# EAGLE board All_Board (EAGLE 9.5.1)
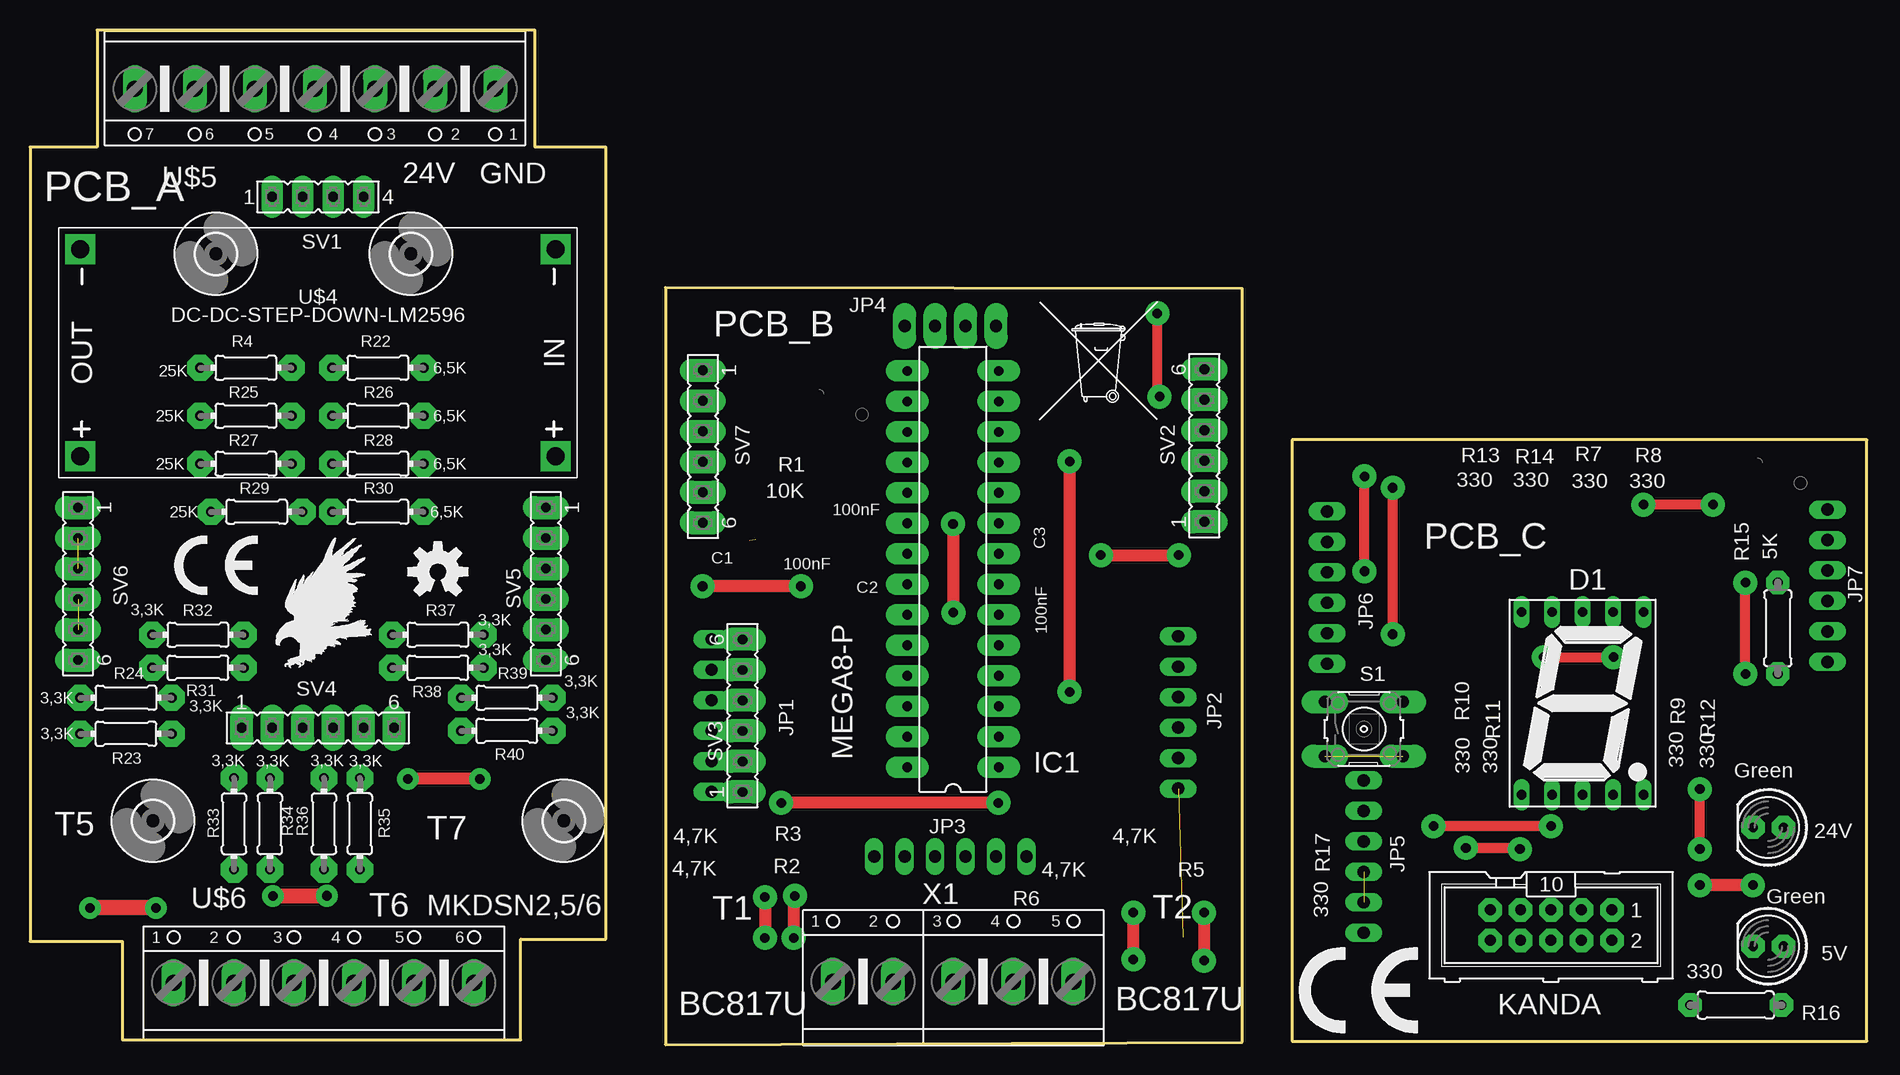
[diagram p0: board, top side]
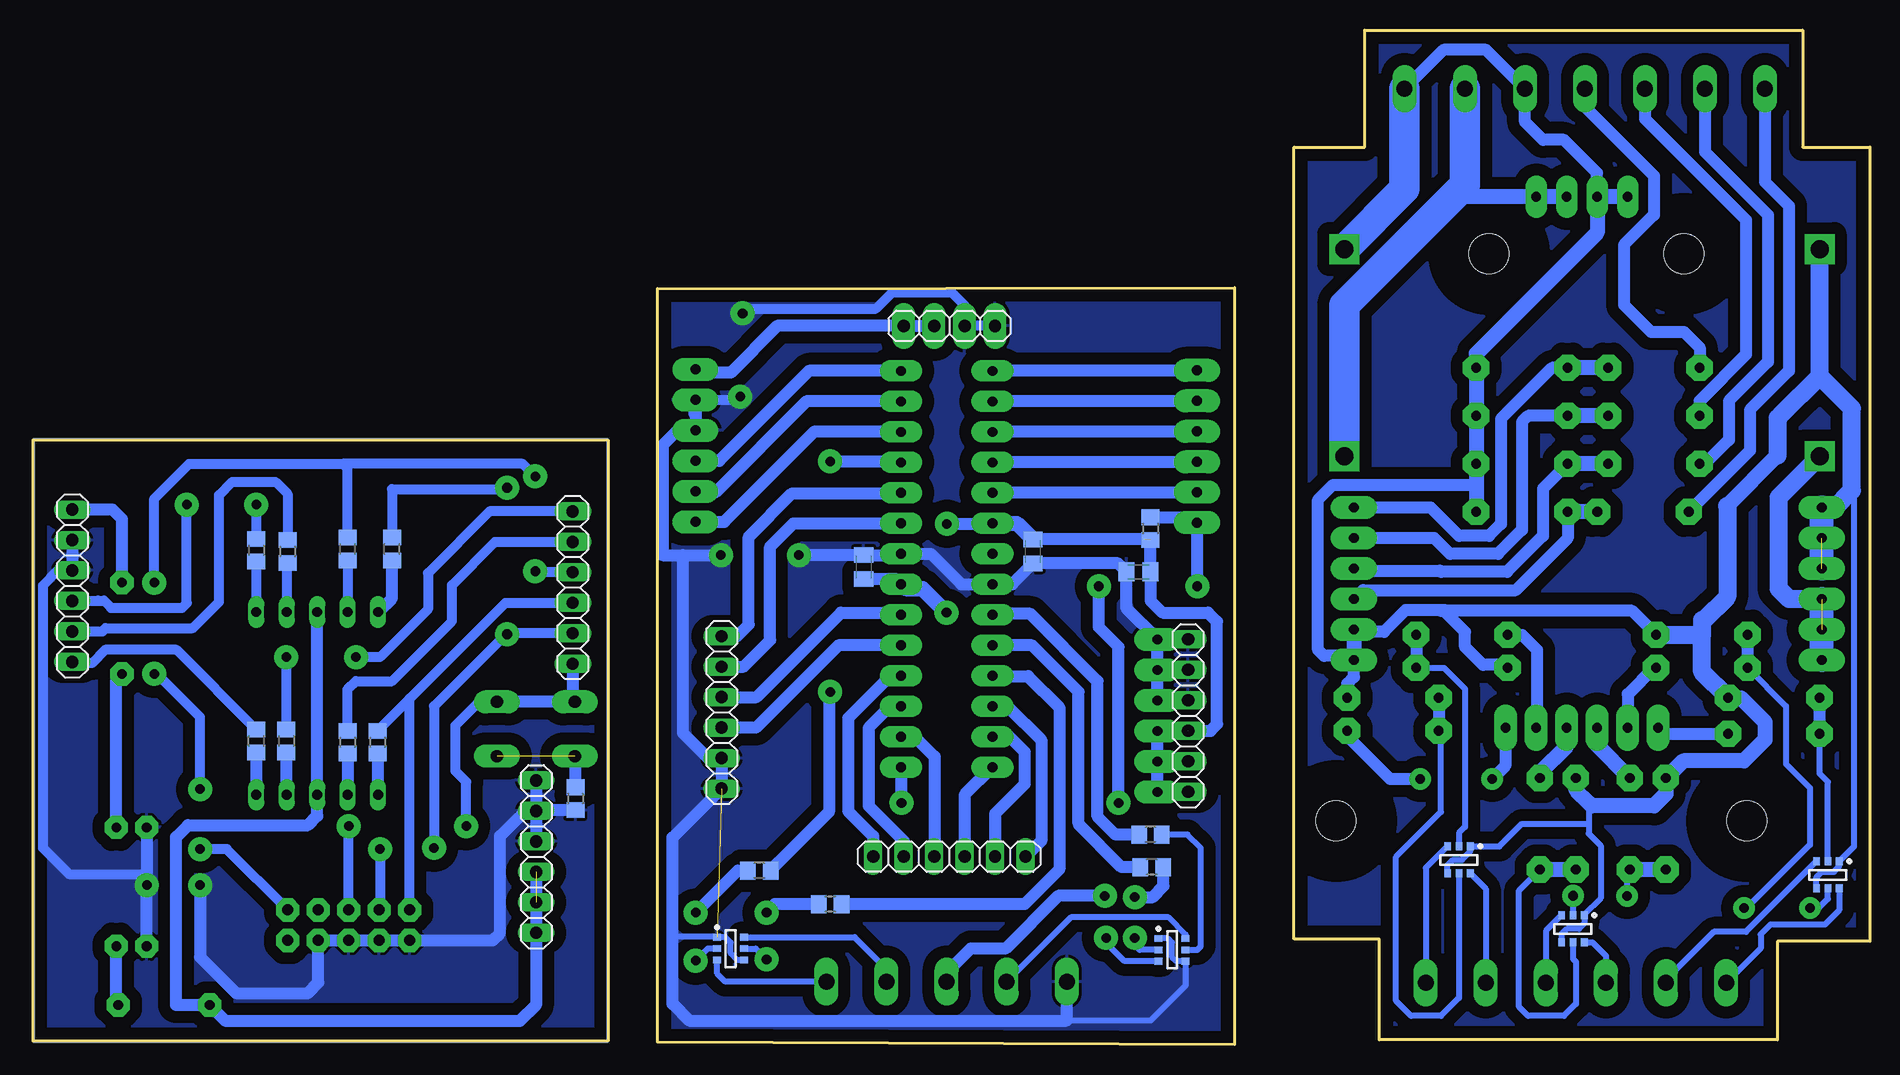
[diagram p1: board, bottom side, seen from below]

Size 153.11 x 84.55 mm. Coordinates in mm from the lower left corner, seen from the top.
Outline: 5.6,84.55 5.6,74.8 0,74.8 0,8.6 7.7,8.6 7.7,0.4 40.9,0.4 40.9,8.8 48,8.8 48,74.8 42.1,74.8 42.1,84.55 5.6,84.55
Outline: 101.06,63 52.96,63.07 52.96,0 101.06,0.2 101.06,63
Outline: 105.19,50.4 105.19,0.3 153.11,0.3 153.11,50.4 105.19,50.4
Copper layers (1*16): Top 0.035mm / dielectric 1.5mm / Bottom 0.035mm
Design rules "default": minimum track width 6mil, minimum drill 0.35mm, track to track 6mil, track to pad 6mil, pad to pad 6mil, via to via 6mil, smd to smd 6mil, copper to edge 40mil, drill to drill 6mil, minimum pad ring 10mil, minimum via ring 8mil, stop-mask expansion 4mil, vias tented up to drill 0mil, thermal gap 10mil

## Footprints (pad centres in the part's own frame; a part is rotated, then mirrored left to right if it is on the bottom)
LED5MM = drill 0.813 pad 1.93 octagon: A -1.27,0; K 1.27,0
C0805K = smd 1.3 x 1.6: 1 -1,0; 2 1,0
7SEG-13 = drill 0.813 long: 1 -5.08,-7.62; 2 -2.54,-7.62; 3 0,-7.62; 4 2.54,-7.62; 5 5.08,-7.62; 6 5.08,7.62; 7 2.54,7.62; 8 0,7.62; 9 -2.54,7.62; 10 -5.08,7.62
3,3 = hole 3.3: 0,0
DIL28-3 = drill 0.813 pad 1.778 long: 1 -16.51,-3.81; 2 -13.97,-3.81; 3 -11.43,-3.81; 4 -8.89,-3.81; 5 -6.35,-3.81; 6 -3.81,-3.81; 7 -1.27,-3.81; 8 1.27,-3.81; 9 3.81,-3.81; 10 6.35,-3.81; 11 8.89,-3.81; 12 11.43,-3.81; 13 13.97,-3.81; 14 16.51,-3.81; 15 16.51,3.81; 16 13.97,3.81; 17 11.43,3.81; 18 8.89,3.81; 19 6.35,3.81; 20 3.81,3.81; 21 1.27,3.81; 22 -1.27,3.81; 23 -3.81,3.81; 24 -6.35,3.81; 25 -8.89,3.81; 26 -11.43,3.81; 27 -13.97,3.81; 28 -16.51,3.81
1X06H = drill 1.016 long: 1 -6.35,0; 2 -3.81,0; 3 -1.27,0; 4 1.27,0; 5 3.81,0; 6 6.35,0
1X04H = drill 1.016 pad 1.93 long: 1 -3.81,0; 2 -1.27,0; 3 1.27,0; 4 3.81,0
ML10 = drill 0.914 pad 1.93 octagon: 1 -5.08,-1.27; 2 -5.08,1.27; 3 -2.54,-1.27; 4 -2.54,1.27; 5 0,-1.27; 6 0,1.27; 7 2.54,-1.27; 8 2.54,1.27; 9 5.08,-1.27; 10 5.08,1.27
R0805 = smd 1.3 x 1.5: 1 -0.95,0; 2 0.95,0
0204/7 = drill 0.813 pad 2.184 octagon: 1 -3.81,0; 2 3.81,0
0207/7 = drill 0.813 pad 1.93 octagon: 1 -3.81,0; 2 3.81,0
B3F-10XX = drill 1.016 pad 1.93 long: 1 -3.251,2.261; 2 3.251,2.261; 3 -3.251,-2.261; 4 3.251,-2.261
FE04-1 = drill 0.813 pad 1.778 long: 1 -3.81,0; 2 -1.27,0; 3 1.27,0; 4 3.81,0
FE06 = drill 0.813 pad 1.93 long: 1 -6.35,0; 2 -3.81,0; 3 -1.27,0; 4 1.27,0; 5 3.81,0; 6 6.35,0
INF-SC74 = smd 0.65 x 0.55: 1 -1.125,0.95; 2 -1.125,0; 3 -1.125,-0.95; 4 1.125,-0.95; 5 1.125,0; 6 1.125,0.95
DC-DC-STEP-DOWN-LM2596 = drill 1.5 pad 2.5 square: IN+ -19.812,8.636; IN- -19.812,-8.636; OUT+ 19.812,8.636; OUT- 19.812,-8.636
MKDSN2,5/7 = drill 1.321 long: 1 -15.033,0; 2 -10.004,0; 3 -5,0; 4 0.004,0; 5 5.008,0; 6 10.008,0; 7 15.008,0
MKDSN2,5/6 = drill 1.321 long: 1 -12.533,0; 2 -7.504,0; 3 -2.5,0; 4 2.504,0; 5 7.508,0; 6 12.508,0
MKDS_3/5 = drill 1.321 long: 1 -10.033,0; 2 -5.004,0; 3 0,0; 4 5.004,0; 5 10.008,0

## Placement (x,y rotation side)
5V  Green  [LED5MM]  144.89,8.2 180 top
24V  Green  [LED5MM]  144.89,18.1 180 top
C1  100nF  [C0805K]  60.96,39.4 180 bottom
C2  100nF  [C0805K]  69.76,41.1 270 bottom
C3  100nF  [C0805K]  83.86,39.8 90 bottom
D1  [7SEG-13]  129.42,28.44 0 top
H1  MOUNT-HOLE3.3  [3,3]  10.25,18.65 0 top
H2  MOUNT-HOLE3.3  [3,3]  15.5,65.9 0 top
H3  MOUNT-HOLE3.3  [3,3]  44.5,18.65 0 top
H4  MOUNT-HOLE3.3  [3,3]  31.75,65.9 0 top
IC1  MEGA8-P  [DIL28-3]  76.94,39.63 90 top
JP1  [1X06H]  56.82,27.42 90 bottom
JP2  [1X06H]  95.71,27.69 90 bottom
JP3  [1X06H]  76.72,15.67 180 bottom
JP4  [1X04H]  76.72,59.89 0 bottom
JP5  [1X06H]  111.17,15.66 90 bottom
JP6  [1X06H]  108.12,38.08 270 bottom
JP7  [1X06H]  149.83,38.24 90 bottom
KANDA  [ML10]  126.79,9.95 180 top
R1  10K  [R0805]  59.96,43 270 bottom
R2  4,7K  [R0805]  59.86,14.8 180 bottom
R3  4,7K  [R0805]  59.96,17.5 180 bottom
R4  25K  [0204/7]  18,56.4 180 top
R5  4,7K  [R0805]  92.56,14.5 180 bottom
R6  4,7K  [R0805]  86.66,11.7 180 bottom
R7  330  [R0805]  131.89,41.1 270 bottom
R8  330  [R0805]  134.49,41.2 270 bottom
R9  330  [R0805]  131.99,25.3 270 bottom
R10  330  [R0805]  126.89,25.2 270 bottom
R11  330  [R0805]  124.39,25.2 270 bottom
R12  330  [R0805]  134.49,25.3 90 bottom
R13  330  [R0805]  123.19,41.3 90 bottom
R14  330  [R0805]  126.89,41.3 90 bottom
R15  5K  [0207/7]  145.69,34.7 90 top
R16  330  [0207/7]  142.19,3.3 180 top
R17  330  [R0805]  107.89,20.5 270 bottom
R22  6,5K  [0204/7]  29,56.4 180 top
R23  3,3K  [0204/7]  8,28.9 180 top
R24  3,3K  [0204/7]  8,25.9 0 top
R25  25K  [0204/7]  18,52.4 180 top
R26  6,5K  [0204/7]  29,52.4 180 top
R27  25K  [0204/7]  18,48.4 180 top
R28  6,5K  [0204/7]  29,48.4 180 top
R29  25K  [0204/7]  18.9,44.4 180 top
R30  6,5K  [0204/7]  29,44.4 180 top
R31  3,3K  [0204/7]  14,34.15 180 top
R32  3,3K  [0204/7]  14,31.4 0 top
R33  3,3K  [0204/7]  17,18.4 270 top
R34  3,3K  [0204/7]  20,18.4 90 top
R35  3,3K  [0204/7]  24.5,18.4 270 top
R36  3,3K  [0204/7]  27.5,18.4 90 top
R37  3,3K  [0204/7]  34,31.4 0 top
R38  3,3K  [0204/7]  34,34.15 180 top
R39  3,3K  [0204/7]  39.75,28.9 180 top
R40  3,3K  [0204/7]  39.75,26.15 0 top
S1  [B3F-10XX]  111.19,26.3 0 top
SV1  [FE04-1]  24,70.65 0 top
SV2  [FE06]  97.89,49.92 90 top
SV3  [FE06]  59.39,27.41 90 top
SV4  [FE06]  24,26.4 0 top
SV5  [FE06]  43,38.4 270 top
SV6  [FE06]  4,38.4 270 top
SV7  [FE06]  56.09,49.84 270 top
T1  BC817U  [INF-SC74]  58.16,7.9 0 bottom
T2  BC817U  [INF-SC74]  94.96,8 0 bottom
T5  BC817U  [INF-SC74]  3.5,14.15 270 bottom
T6  BC817U  [INF-SC74]  24.75,9.65 270 bottom
T7  BC817U  [INF-SC74]  34.25,15.4 270 bottom
U$1  [CE_5MM]  12,37.4 0 top
U$2  [EAGLE-PLC-8MM]  20.5,31.4 0 top
U$3  [OSHW-LOGO-M]  34,39.4 0 top
U$4  DC-DC-STEP-DOWN-LM2596  [DC-DC-STEP-DOWN-LM2596]  24,57.65 180 top
U$5  24V  [MKDSN2,5/7]  23.75,79.65 180 top
U$6  MKDSN2,5/6  [MKDSN2,5/6]  24.5,5.15 0 top
U$7  [LOGO]  61.96,52 0 top
U$8  [TONNE_10.00]  88.96,55 0 top
U$9  [CE_7.3MM]  105.69,0.9 0 top
U$10  [LOGO]  140.19,46.3 0 top
X1  [MKDS_3/5]  76.96,5.25 0 top

## Library data of the parts
5V 24V = led
C1-C3 = rcl; SPICEPREFIX: C
D1 = special
H1-H4 = holes
IC1 = atmel; OC_FARNELL: unknown; OC_NEWARK: unknown
JP1-JP7 = pinhead
KANDA = con-harting-ml; OC_FARNELL: unknown; OC_NEWARK: unknown
R1-R17 R22-R40 = rcl; SPICEPREFIX: R
S1 = switch-omron; MPN: B3F-1000; OC_FARNELL: 176432; OC_NEWARK: 36M3542
SV1-SV7 = con-lsta; OC_FARNELL: unknown; OC_NEWARK: unknown
T1 T2 T5-T7 = transistor
U$1 U$2 U$8 U$9 = logo
U$3 = Particle-Devices
U$4 = diy-modules
U$5 U$6 = con-ptr500
U$7 U$10 = atmel
X1 = con-ptr500; OC_FARNELL: unknown; OC_NEWARK: unknown

## Nets
+5V: SV6.4 SV6.5 SV6.6 U$4.OUT+
+5V1: C1.1 C2.1 C3.1 IC1.7 IC1.20 JP1.1 JP1.2 JP1.3 R1.2 SV3.1 SV3.2 SV3.3
+5V2: D1.3 D1.8 JP5.1 JP5.2 JP5.3 R16.2
+24V: SV1.3 SV1.4 U$4.IN+ U$5.2
+24V1: JP4.1 JP4.2 SV2.6
+24V2: JP7.6 R15.2
A: IC1.13 SV2.2
A1: JP7.2 R7.1
B: IC1.14 SV2.3
B1: JP7.3 R8.1
C: IC1.15 SV7.1
C1: JP6.1 R9.1
D: IC1.16 SV7.2
D1: JP6.2 R10.1
DOT: IC1.12 SV2.1
DOT1: JP7.1 R12.2
GND: R22.1 R23.1 R26.1 R28.1 R30.1 R31.1 R33.1 R35.1 R37.1 R39.1 SV1.1 SV1.2 SV5.5 SV5.6 SV6.1 SV6.2 SV6.3 T5.1 T5.4 T6.1 T6.4 T7.1 T7.4 U$4.IN- U$4.OUT- U$5.1 U$5.3
GND1: C1.2 C2.2 C3.2 IC1.8 IC1.22 JP1.4 JP1.5 JP1.6 JP2.1 JP2.2 JP4.3 JP4.4 SV2.4 SV2.5 SV3.4 SV3.5 SV3.6 T1.1 T1.4 T2.1 T2.4 X1.1
GND2: 5V.K 24V.K JP5.4 JP5.5 JP5.6 JP7.4 JP7.5 KANDA.4 KANDA.6 KANDA.8 KANDA.10 R17.2
IN_1: R4.1 R22.2 SV5.1
IN_2: R25.1 R26.2 SV5.2
IN_3: R27.1 R28.2 SV5.3
IN_4: R29.1 R30.2 SV5.4
IN_5: IC1.10 JP2.6
IN_6: IC1.9 JP2.5
IN_7: IC1.6 JP2.4
IN_8: IC1.5 JP2.3
MISO: IC1.18 SV7.4
MISO1: JP6.4 KANDA.9 R11.1
MOSI: IC1.17 SV7.3
MOSI1: JP6.3 KANDA.1 R14.2
N$2: T2.6 X1.4
N$3: T2.3 X1.5
N$4: T1.3 X1.3
N$5: T1.6 X1.2
N$6: R2.1 T1.2
N$7: R5.2 T2.2
N$8: R3.1 T1.5
N$9: R6.2 T2.5
N$10: KANDA.3
N$11: R17.1 S1.3 S1.4
N$12: D1.7 R7.2
N$13: D1.6 R8.2
N$14: D1.4 R9.2
N$15: D1.2 R10.2
N$16: D1.1 R11.2
N$17: D1.9 R14.1
N$18: D1.10 R13.1
N$19: D1.5 R12.1
N$20: 24V.A R15.1
N$21: 5V.A R16.1
N$25: R4.2 U$5.4
N$26: R25.2 U$5.5
N$27: R27.2 U$5.6
N$28: R29.2 U$5.7
N$29: T5.6 U$6.1
N$30: R23.2 R24.1 T5.2
N$31: R24.2 SV4.1
N$32: T5.3 U$6.2
N$33: R31.2 R32.1 T5.5
N$34: R32.2 SV4.2
N$35: T6.6 U$6.3
N$36: R33.2 R34.1 T6.2
N$37: R34.2 SV4.3
N$38: T6.3 U$6.4
N$39: R35.2 R36.1 T6.5
N$40: R36.2 SV4.4
N$41: T7.6 U$6.5
N$42: R37.2 R38.1 T7.2
N$43: R38.2 SV4.5
N$44: T7.3 U$6.6
N$45: R39.2 R40.1 T7.5
N$46: R40.2 SV4.6
OUT_1: IC1.26 JP3.1
OUT_2: IC1.27 JP3.2
OUT_3: IC1.28 JP3.3
OUT_4: IC1.2 JP3.4
OUT_5: IC1.3 JP3.5
OUT_6: IC1.4 JP3.6
OUT_7: IC1.24 R2.2
OUT_8: IC1.23 R3.2
OUT_9: IC1.11 R5.1
OUT_10: IC1.25 R6.1
RESET: IC1.1 R1.1 SV7.6
RESET1: JP6.6 KANDA.5 S1.1 S1.2
SCK: IC1.19 SV7.5
SCK1: JP6.5 KANDA.7 R13.2

## Tracks (layer width: path | path; a pad name or v marks a point on that pad's centre or on a via)
+5V  (1 unrouted)
  Bottom 1.5: SV6.4 6.73,37.13 7.6,38 7.6,45.6 U$4.OUT+
  Bottom 2: U$4.OUT+ 4,49.01 | SV6.6 SV6.4
+5V1  (via drill 0.8 pad 2)  (2 unrouted)
  Top 1.016: v76.96,36 76.96,43.4 v76.94,43.4
  Bottom 0.813: IC1.7 81.2,38.8
  Bottom 1.016: JP1.3 SV3.3 SV3.2 | 81.2,38.8 C3.1 | JP1.1 SV3.1 SV3.2 | JP1.2 SV3.2 | 60.5,42.1 C2.1 | v76.94,43.4 73.17,43.4 IC1.20 | R1.2 C1.1 59.96,37 58.96,36 55.16,36 54.41,35.25 54.41,26.7 54.96,26.15 JP1.3
  Bottom 1.27: IC1.20 71.1,43.44 C2.1 | IC1.7 80.4,38 78.96,38 v76.96,36
+5V2  (1 unrouted)
  Bottom 1.016: JP5.3 JP5.1 111.19,9.29 111.19,3.3 112.54,1.95 137.03,1.95 R16.2 141.19,3.3 141.19,17.3 140.19,18.3 130.19,18.3 129.42,19.07 D1.3 D1.8
+24V
  Bottom 1.27: SV1.3 SV1.4 34.75,70.65
  Bottom 2.54: U$5.2 33.75,71.65 34.75,70.65 43.8,61.6 43.8,49.03 U$4.IN+
+24V1
  Bottom 1.016: JP4.2 JP4.1 91.07,59.89 94.96,56 97.62,56 SV2.6
+24V2
  Bottom 1.016: R15.2 145.69,43.8 146.48,44.59 JP7.6
A
  Bottom 1.016: IC1.13 88.66,53.6 96.26,46 97.78,46 SV2.2
A1
  Bottom 0.813: JP7.2 147.33,34.43 147.06,34.7 139.79,34.7 137.59,36.9 137.59,45.8 136.49,46.9 132.89,46.9 131.89,45.9 R7.1
B
  Bottom 1.016: IC1.14 88.42,56.14 95.91,48.65 SV2.3
B1  (via drill 0.8 pad 2)
  Top 0.813: v140.29,45 v134.49,45
  Bottom 0.813: JP7.3 147.72,36.97 147.69,37 147.19,37 146.59,36.4 140.69,36.4 140.29,36.8 v140.29,45 | v134.49,45 R8.1
C
  Bottom 0.508: IC1.15 73.08,56.19
  Bottom 1.016: 73.08,56.19 SV7.1
C1  (via drill 0.8 pad 2)
  Top 0.813: v126.19,32.3 v131.99,32.3
  Bottom 0.813: JP6.1 115.06,44.43 120.19,39.3 120.19,36.3 124.19,32.3 v126.19,32.3 | v131.99,32.3 R9.1
D
  Bottom 0.508: IC1.16 73.08,53.65
  Bottom 1.016: 73.08,53.65 SV7.2
D1
  Bottom 0.813: R10.1 126.89,29.6 126.19,30.3 123.19,30.3 118.19,35.3 118.19,38.3 114.6,41.89 JP6.2
DOT
  Bottom 1.016: SV2.1 95.49,43.57 87.96,51.1 80.8,51.1 IC1.12
DOT1
  Bottom 0.813: R12.2 141.14,32.9 147.09,32.9 148.19,31.8 149.74,31.8 JP7.1
GND  (1 unrouted)
  Bottom 0.508: T5.4 4.45,13.95 4,14.4 3,14.4 2.55,14.85 T5.1 1.3,16.53 1.3,45.97 1.5,46.18 | T6.4 25.7,9.2 25.25,9.65 24.25,9.65 23.8,10.1 T6.1 23.8,10.85 22.44,12.21 22.44,16.59 23.44,17.59 23.44,18.4 | 23.44,20.15 23.44,18.4 | T7.4 35.2,14.95 34.75,15.4 34,15.4 33.3,16.1 T7.1 30.88,16.52 29,18.4 23.44,18.4
  Bottom 1.016: SV1.2 22.75,70.67 22.75,72.65 25.5,75.4 27.25,75.4 28.75,76.9 U$5.3 32,82.9 35.53,82.9 U$5.1 | R37.1 30.44,31.65 32.25,31.65 33.75,33.15 33.75,34.4 35.5,36.15 | 44,34.4 40.5,34.4 38.7,36.2 35.8,36.2 | 35.8,36.2 35.45,36.2 35.5,36.15 | R39.1 43.56,30.09 43,30.65 SV5.6 43.35,32.4 45.5,32.4 46,32.9 46,45.4 44.75,46.65 32.81,46.65 | 35.5,36.15 19.81,36.15 R31.1 | 35.8,36.2 35.75,36.15 35.5,36.15
  Bottom 1.27: SV1.1 SV1.2 22.73,67.67 32.81,57.59 R22.1 R26.1 R28.1 32.81,46.65 R30.1 | 44,34.4 43,34.4 SV5.5 SV5.6 | R23.1 10.75,28.9 8.75,26.9 8.75,25.4 10.5,23.65 15.56,23.65 R33.1 17,20.9 18,19.9 23.19,19.9 23.44,20.15 24.5,21.21 R35.1 | 7.5,52.4 7.7,52.2 | 7.7,49.1 11.9,44.9 | SV6.1 2.93,44.75 | 17.81,34.21 R31.1
  Bottom 1.5: 4.19,55.71 U$4.OUT- | 4.19,55.71 7.5,52.4 | R23.1 14,31.09 14,34.15 | 14,34.15 14,35.4 13.8,35.4 11.9,37.3 11.9,44.9 | R31.1 14,34.15 | 7.7,52.2 7.7,49.1 | 2.93,44.75 1.5,46.18 1.5,53.02 4.19,55.71
  Bottom 2: SV6.3 SV6.1
  Bottom 2.54: U$5.1 38.78,71.31 U$4.IN-
GND1  (via drill 0.8 pad 2)  (1 unrouted)
  Top 0.813: v94.16,54 93.96,54.2 v93.96,60.93 93.96,61
  Top 1.016: v89.26,40.8 v95.76,40.8
  Bottom 0.508: T1.1 58.51,8.85 58.16,8.5 58.16,7.3 57.81,6.95 T1.4 57.04,4.92 59.96,2 66.96,2 | T2.4 94.41,7.05 94.96,7.6 94.96,8.5 95.41,8.95 T2.1 96.13,9 99.66,9 99.61,8.95
  Bottom 0.813: IC1.8 80.85,40.8 | SV2.5 94.43,53.73 v94.16,54 | JP4.4 JP4.3 75.5,59.94 75.5,61.65 76.5,62.65 81.52,62.65 82.84,61.33 93.56,61.33 v93.96,60.93
  Bottom 1.016: SV3.6 61.96,36.33 C1.2 62.66,40.1 C2.2 71.5,38.36 IC1.22 75.72,38.36 78.26,40.9 IC1.8 | 80.85,40.8 C3.2 v89.26,40.8 | SV3.5 SV3.4 JP1.4 | SV3.5 SV3.6 | JP1.6 SV3.6 | JP1.5 SV3.5 | 66.93,4.03 X1.1 66.96,5.22 66.96,2 98.41,2 99.81,3.4 99.81,17.25 JP2.1 JP2.2 96.84,23.88 98.96,26 98.96,40.8 | 97.96,52.5 97.96,53.66 SV2.5 SV2.4 99.39,51.19 100.65,49.93 100.65,40.8 98.96,40.8 | 98.96,40.8 v95.76,40.8
  pour Bottom (isolate 1): 52.96,63.07 52.96,0 101.06,0.2 101.06,63
GND2  (via drill 0.8 pad 2)
  Top 1.016: v143.62,13.3 v139.19,13.3
  Bottom 0.254: 153.11,0.3 105.19,0.3 105.19,50.4 153.11,50.4 153.11,0.3
  Bottom 0.508: JP7.4 150.8,39.51
  Bottom 0.813: 112.25,19.3 111.17,19.3 | JP7.4 151.03,39.51 152.29,38.25 152.29,16.4 150.09,14.2 143.62,14.2
  Bottom 1.016: R17.2 111.09,19.55 JP5.5 | JP5.6 111.17,19.3 JP5.4 | 5V.K v143.62,13.3 | v143.62,13.3 143.62,14.2 | 24V.K 143.62,15.3 v143.62,13.3 | JP7.5 JP7.4 | 112.25,19.3 114.19,17.36 114.19,9.3 114.81,8.68 KANDA.10 KANDA.4 129.33,5.16 130.19,4.3 136.19,4.3 139.19,7.3 v139.19,13.3
  pour Bottom (isolate 1): 153.11,0.3 105.19,0.3 105.19,50.4 153.11,50.4
IN_1
  Bottom 1.016: R22.2 26.5,56.4 30.75,52.15 30.75,43.4 31.75,42.4 34.25,42.4 36.6,44.75 SV5.1
  Bottom 1.27: R4.1 R22.2
IN_2
  Bottom 1.016: R26.2 28.5,52.4 29,51.9 29,42.9 31,40.9 35,40.9 36.31,42.21 SV5.2
  Bottom 1.27: R25.1 R26.2
IN_3
  Bottom 1.016: R28.2 27.25,46.34 27.25,42.4 30.25,39.4 35.75,39.4 35.85,39.5 42.83,39.5 SV5.3
  Bottom 1.27: R27.1 R28.2
IN_4
  Bottom 1.016: R30.2 25.19,42.21 29.52,37.88 42.25,37.88 SV5.4
  Bottom 1.27: R29.1 R30.2
IN_5
  Bottom 1.016: IC1.10 80.8,45.93 89.83,45.93 93.46,42.3 93.46,35 94.42,34.04 JP2.6
IN_6
  Bottom 0.508: 80.8,43.39 IC1.9
  Bottom 1.016: JP2.5 93.86,31.5 91.66,33.7 91.66,41.5 89.72,43.44 IC1.9
IN_7
  Bottom 1.016: JP2.4 92.8,28.96 85.76,36 80.94,36
  Bottom 1.27: 80.94,36 IC1.6
IN_8
  Bottom 1.016: IC1.5 85.98,33.28 92.84,26.42 JP2.3
  Bottom 1.27: IC1.5 81.03,33
MISO
  Bottom 0.813: IC1.18 73.08,48.57
  Bottom 1.016: 73.08,48.57 SV7.4
MISO1
  Bottom 0.813: R11.1 121.71,28.82 | 121.71,28.82 113.73,36.81 JP6.4 | KANDA.9 121.71,28.82
MOSI
  Bottom 0.813: IC1.17 73.08,51.11
  Bottom 1.016: 73.08,51.11 SV7.3
MOSI1  (via drill 0.8 pad 2)
  Top 0.813: v139.19,16.3 v139.19,21.3 | v142.99,30.9 v142.99,38.5 | v111.24,39.45 111.24,47.25 111.19,47.3 v111.24,47.35
  Bottom 0.813: KANDA.1 136.95,16.3 v139.19,16.3 | v139.19,21.3 139.19,27.3 142.69,30.8 142.89,30.8 v142.99,30.9 | v142.99,38.5 142.99,45.5 140.09,48.4 127.29,48.4 | JP6.3 111.24,39.35 111.29,39.4 v111.24,39.45 | v111.24,47.35 112.29,48.4 127.29,48.4 | 127.29,48.4 126.89,48 R14.2
N$1
  pour Bottom (isolate 1): 0,74.8 0,8.6 7.7,8.6 7.7,0.4 40.9,0.4 40.9,8.8 48,8.8 48,74.8 42.1,74.8 42.1,84.55 5.6,84.55 5.6,74.8
N$2
  Bottom 0.508: T2.6 84.61,8.95 81.96,6.3 X1.4
N$3
  Bottom 0.508: X1.5 95.41,5.25 96.08,5.92 T2.3
N$4  (via drill 0.8 pad 2)
  Top 1.016: v63.66,8.9 63.66,12.4 v63.76,12.4
  Bottom 0.508: T1.3 62.11,6.95 63.66,8.5 v63.66,8.9
  Bottom 1.016: v63.76,12.4 67.66,12.4 72.06,8 74.96,8 76.96,6 X1.3
N$5
  Bottom 0.508: X1.2 66.61,10.6 58.46,10.6 57.04,9.18 T1.6
N$6  (via drill 0.8 pad 2)
  Top 1.016: v61.26,12.3 v61.26,8.9
  Bottom 0.508: T1.2 60.86,7.9 61.26,8.3 v61.26,8.9
  Bottom 1.016: v61.26,12.3 59.76,12.3 58.86,13.2 58.86,14.75 R2.1
N$7  (via drill 0.8 pad 2)
  Top 1.016: v97.86,11 v97.86,7
  Bottom 0.508: v97.86,7 96.86,8 T2.2
  Bottom 1.016: v97.86,11 94.36,14.5 R5.2
N$8
  Bottom 0.508: T1.5 56.06,7.9 55.76,8.2 55.76,16.4 56.86,17.5 R3.1
N$9  (via drill 0.8 pad 2)
  Top 1.016: v91.96,7.1 v91.96,11
  Bottom 0.508: T2.5 92.86,8 v91.96,7.1
  Bottom 1.016: R6.2 91.26,11.7 v91.96,11
N$11  (1 unrouted)
  Bottom 1.016: S1.3 107.94,21.5 R17.1
N$12
  Bottom 0.813: R7.2 131.96,40.08 D1.7
N$13
  Bottom 0.813: R8.2 D1.6
N$14
  Bottom 1.016: R9.2 131.99,20.85 D1.4
N$15
  Bottom 1.016: R10.2 D1.2
N$16
  Bottom 1.016: R11.2 124.39,20.87 D1.1
N$17
  Bottom 0.813: R14.1 D1.9
N$18
  Bottom 1.016: D1.10 123.19,37.21 R13.1
N$19
  Bottom 1.016: R12.1 D1.5
N$20
  Bottom 1.016: 24V.A 146.16,30.42 R15.1
N$21
  Bottom 1.016: R16.1 146.16,3.46 5V.A
N$25
  Bottom 1.016: U$5.4 23.75,78.15 18,72.4 18,69.15 20.5,66.65 20.5,61.65 18.25,59.4 15.5,59.4 14.19,58.09 R4.2
N$26
  Bottom 1.016: U$5.5 18.74,77.91 18.75,77.9 18.75,77.15 10.32,68.72 10.32,57.52 14.19,53.65 R25.2
N$27
  Bottom 1.016: U$5.6 13.74,74.39 8.5,69.15 8.5,56.9 11.75,53.65 11.75,50.4 13.75,48.4 R27.2
N$28
  Bottom 1.016: U$5.7 8.74,71.89 6.75,69.9 6.75,56.15 10,52.9 10,49.49 R29.2
N$29
  Bottom 0.508: T5.6 2.55,11.2 3.75,10 8.28,10 9.1,9.18 9.1,8.02 U$6.1
N$30
  Bottom 0.508: T5.2 3.5,21.9 4.19,22.59 R24.1
  Bottom 1.016: R24.1 R23.2
N$31
  Bottom 1.016: SV4.1 17.15,25.9 R24.2
N$32
  Bottom 0.508: T5.3 10.33,9.4 13,9.4 17,5.4 U$6.2
N$33  (via drill 0.8 pad 1.8)
  Top 1.27: v10.5,11.4 v5,11.4
  Bottom 0.508: R32.1 7,28.21 7,23.4 5,21.4 5,16.65 10.25,11.4 v10.5,11.4 | v5,11.4 4.25,11.4 3.5,12.15 T5.5
  Bottom 1.016: R32.1 R31.2
N$34
  Bottom 1.016: R32.2 18,31.4 20.19,29.21 SV4.2
N$35
  Bottom 0.508: T6.6 23.12,8.53 22,7.4 U$6.3
N$36  (via drill 0.8 pad 1.8)
  Top 0.508: v24.75,12.4
  Top 1.27: v20.25,12.4 v24.75,12.4
  Bottom 0.508: R34.1 20.25,14.34 v20.25,12.4 | v24.75,12.4 T6.2
  Bottom 1.27: R33.2 R34.1
N$37
  Bottom 1.27: R34.2 22.73,24.94 SV4.3
N$38
  Bottom 0.508: T6.3 27,9.47 U$6.4
N$39
  Bottom 0.508: R36.1 29.25,12.84 29.25,3.15 28.5,2.4 25.5,2.4 24.5,3.4 24.5,6.9 24.75,7.15 T6.5
  Bottom 1.27: R35.2 R36.1
N$40
  Bottom 1.27: SV4.4 25.27,24.88 27.5,22.65 R36.2
N$41
  Bottom 0.508: T7.6 32.01,12.98 U$6.5
N$42
  Bottom 0.508: R37.2 35.5,31.4 33.75,29.65 33.75,18.15 34.25,17.65 T7.2
  Bottom 1.016: R38.1 R37.2
N$43
  Bottom 1.016: R38.2 29,34.15 27.75,32.9 27.75,26.46 SV4.5
N$44
  Bottom 0.508: T7.3 37.01,14.72 U$6.6
N$45
  Bottom 0.508: T7.5 34.25,3.9 35.75,2.4 38.25,2.4 39.5,3.65 39.5,15.65 35.75,19.4 35.75,25.96 R40.1
  Bottom 1.016: R39.2 R40.1
N$46  (via drill 0.8 pad 1.8)
  Top 1.016: v37.5,22.15 v31.5,22.15
  Bottom 1.016: R40.2 43.56,25.71 40,22.15 v37.5,22.15 | v31.5,22.15 30.35,23.3 SV4.6
OUT_1
  Bottom 0.813: 71.86,28.2
  Bottom 1.016: IC1.26 71.86,28.2 | JP3.1 69.06,16.98 69.06,25.4 71.86,28.2
OUT_2
  Bottom 0.508: IC1.27 72.38,25.66
  Bottom 1.016: IC1.27 71.72,25.66 70.46,24.4 70.46,21.7 72.91,19.25 JP3.2
OUT_3
  Bottom 1.016: IC1.28 75.45,20.8 JP3.3
OUT_4
  Bottom 0.813: 77.96,15.7 JP3.4
  Bottom 1.016: IC1.2 79.62,25.66 77.96,24 77.96,15.7
OUT_5
  Bottom 1.016: IC1.3 81.66,28.2 83.46,26.4 83.46,19.9 80.53,16.97 JP3.5
OUT_6
  Bottom 1.016: IC1.4 81.62,30.74 85.16,27.2 85.16,19.46 83.07,17.37 JP3.6
OUT_7
  Bottom 1.016: R2.2 62.36,14.8 65.96,18.4 65.96,29.4 69.84,33.28 IC1.24
OUT_8
  Bottom 1.016: R3.2 62.86,17.5 64.36,19 64.36,30.3 69.96,35.9 73.05,35.9 IC1.23
OUT_9  (via drill 0.8 pad 2)
  Top 1.016: v86.66,48.6 v86.66,29.4
  Bottom 1.016: R5.1 90.91,15.25 86.76,19.4 86.76,29.3 v86.66,29.4 | v86.66,48.6 80.84,48.6 IC1.11
OUT_10
  Bottom 1.016: IC1.25 73.1,30.7 70.16,30.7 67.56,28.1 67.56,14.6 70.46,11.7 R6.1
RESET  (via drill 0.8 pad 2)
  Top 1.016: v80.71,20.15 62.71,20.15 62.66,20.2 v62.61,20.15 | v64.26,38.2 v56.06,38.2
  Bottom 1.016: R1.1 56.55,43.95 SV7.6 56.06,43.46 v56.06,38.2 | IC1.1 80.75,20.21 80.76,20.2 v80.71,20.15 | v62.61,20.15 62.61,33.15 64.26,34.8 v64.26,38.2
RESET1  (via drill 0.8 pad 2)
  Top 0.813: v126.79,18.2 v116.99,18.2
  Bottom 0.813: KANDA.5 v126.79,18.2 | v116.99,18.2 116.99,21.9 117.89,22.8 117.89,26.6 115.93,28.56 S1.2
  Bottom 1.016: JP6.6 108.12,28.74 S1.1 S1.2
SCK
  Bottom 0.813: IC1.19 73.08,46.03
  Bottom 1.016: 73.08,46.03 SV7.5
SCK1  (via drill 0.8 pad 2)
  Top 0.813: v113.59,34.2 v113.59,46.4 | v119.69,16.4 124.09,16.4 v124.19,16.3
  Bottom 0.813: JP6.5 108.15,34.3 113.59,34.3 v113.59,34.2 113.69,34.2 119.69,28.2 v119.69,16.4 | R13.2 123.19,46.3 113.69,46.3 v113.59,46.4 | v124.19,16.3 124.19,11.28 KANDA.7

## Text on the board
tNames: GND | PCB_A | PCB_B | PCB_C